# Altium PCB Bat_Detector_PCB.PcbDoc
Units mm, origin at the board's own origin, x right, y up, seen from the top; angles counter-clockwise.
Board outline 22.86 x 24.77 mm, 2 copper layers (Top Layer, Bottom Layer); 13 components, 7 nets, 34 pads, 54 vias.
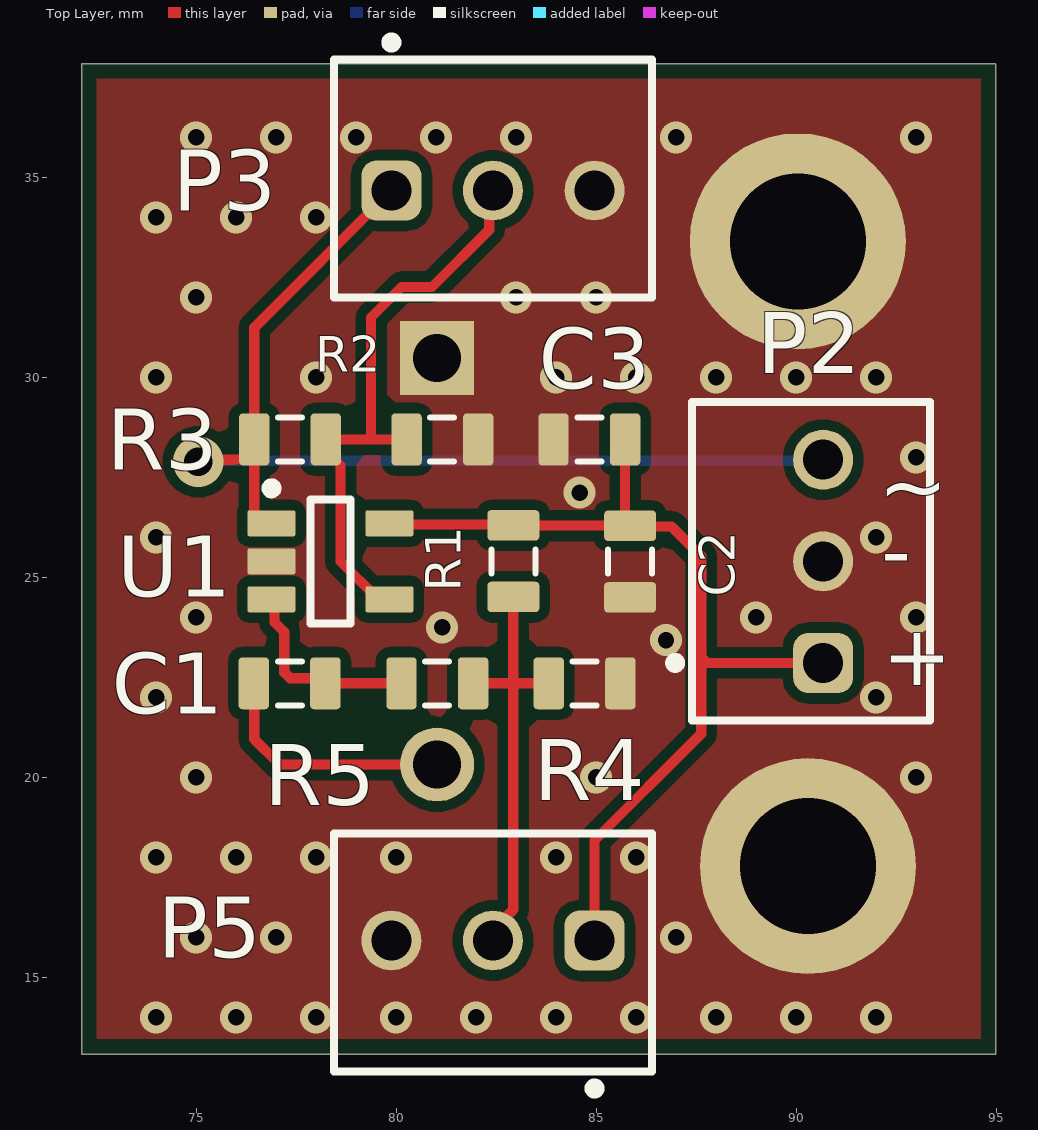
[diagram p0: Top Layer view]
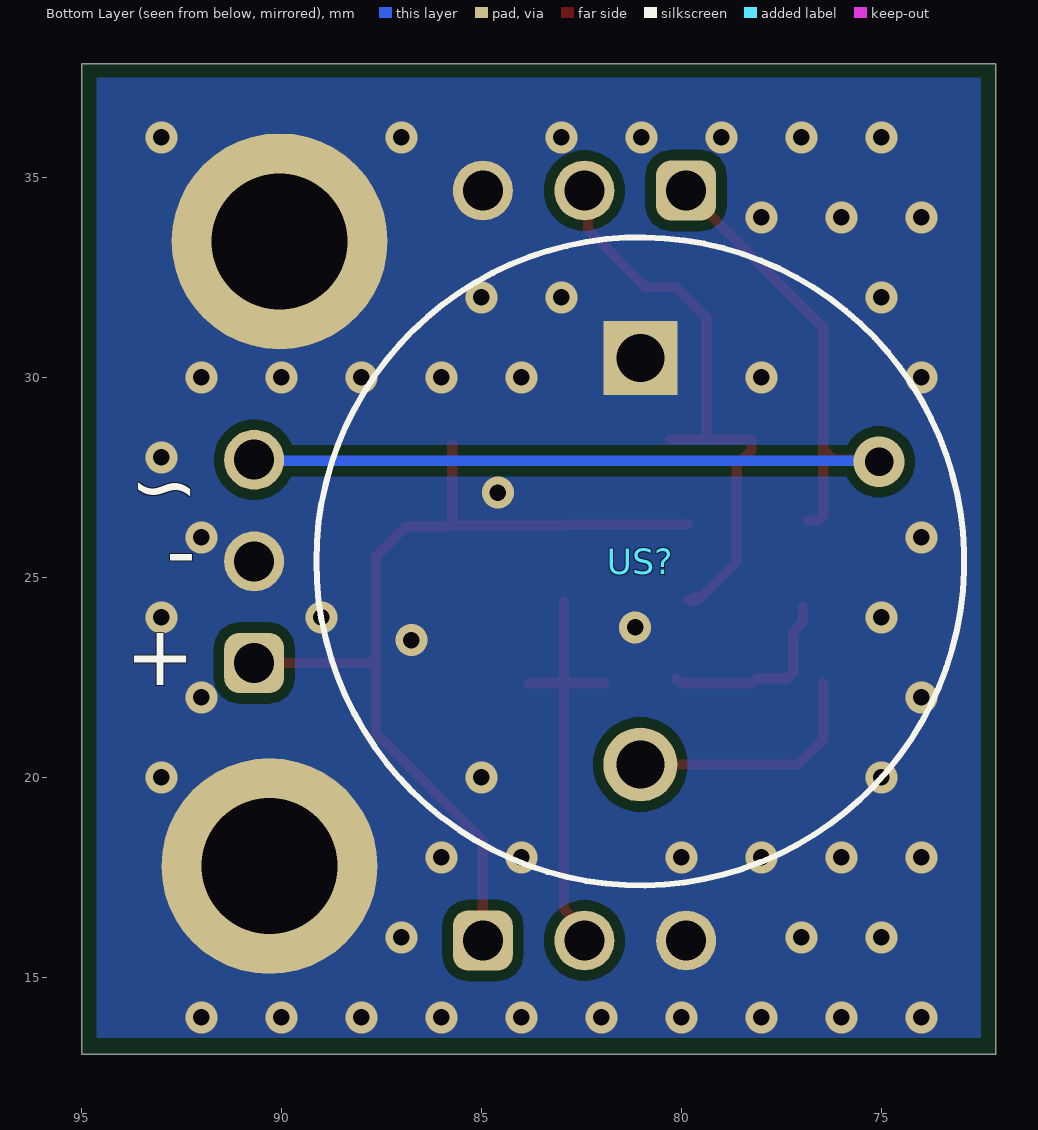
[diagram p1: Bottom Layer view, seen from below]
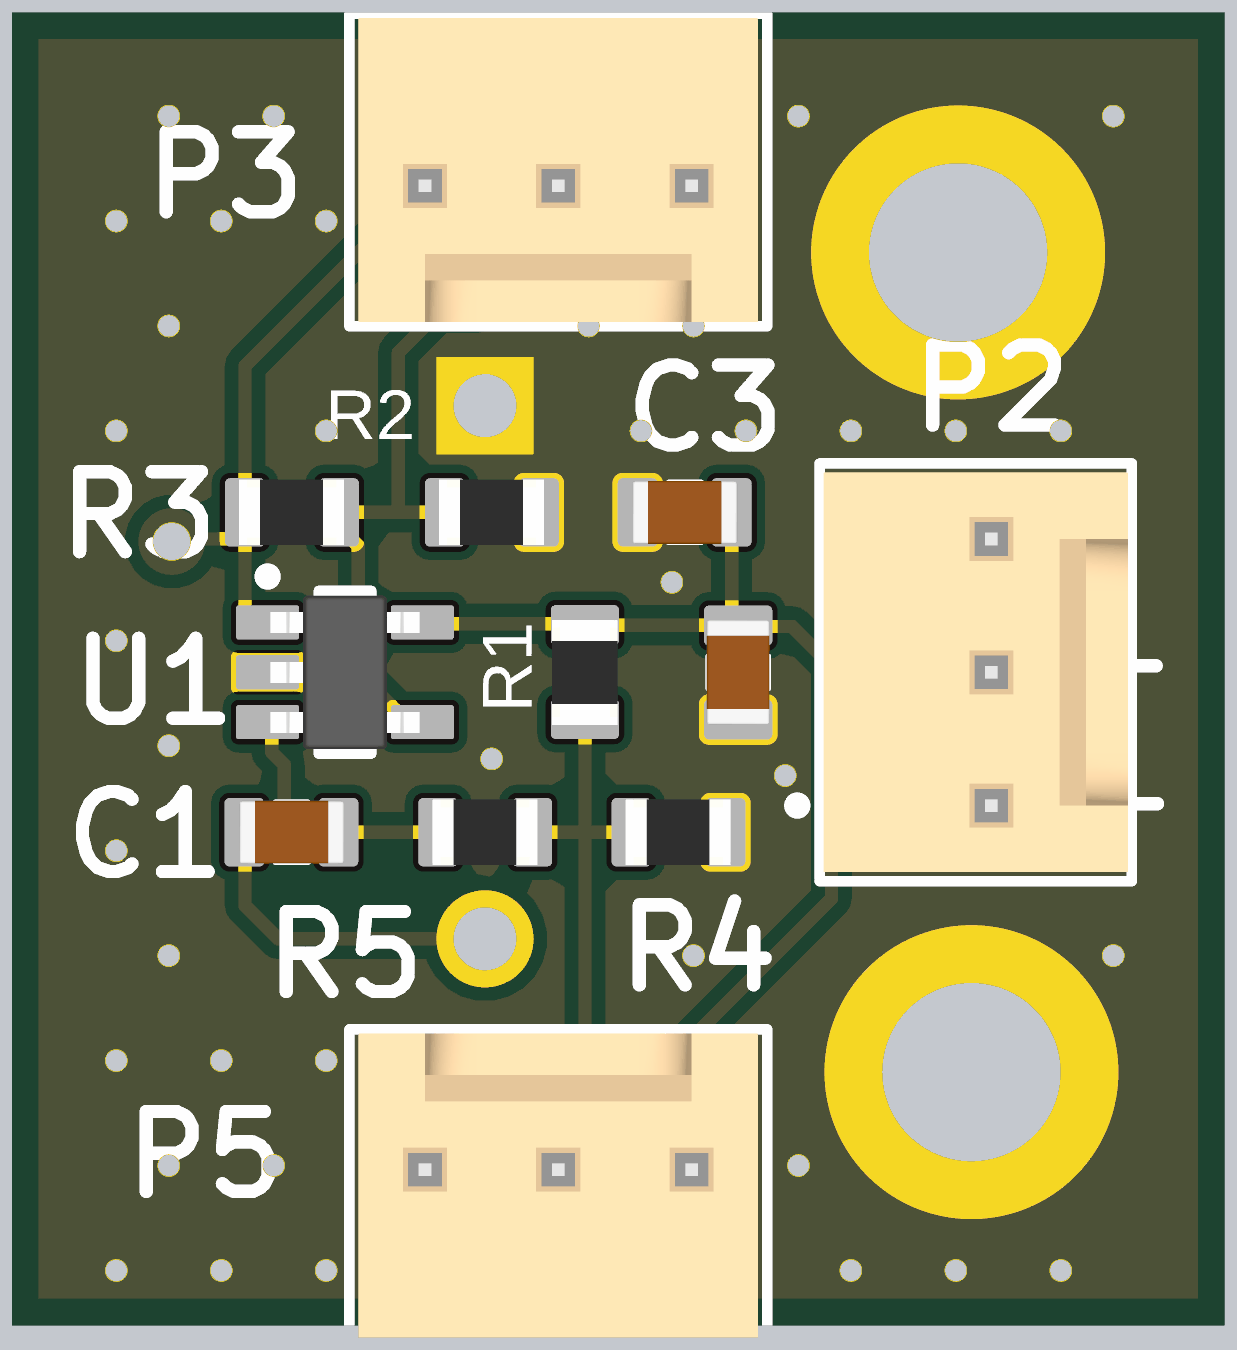
[diagram p2: 3D render of the assembled board from above, using the file's embedded part models]

## Layer stack, top to bottom
Top Solder: solder mask 0.0102, Solder Resist, Dk 3.5
Top Layer: signal copper 0.0356
Dielectric 1: dielectric 0.32, FR-4, Dk 4.8
Bottom Layer: signal copper 0.0356
Bottom Solder: solder mask 0.0102, Solder Resist, Dk 3.5

## Board outline
72.136,13.081 72.136,37.846 94.996,37.846 94.996,13.081

## Design rules (kind name [scope] priority, off if disabled: settings)
Clearance "Stitching GND" [IsStitchingVia and InNet('GND') vs (IsVia and (Not IsStitchingVia)) Or IsPad] p1: gap=0.127 ignorepadtopadclearanceinfootprint=FALSE
Clearance [All] p2: gap=0.254 ignorepadtopadclearanceinfootprint=FALSE
PolygonConnect [All] p1: connectstyle=Direct reliefconductorwidth=0.254 reliefentries=4 polygonreliefangle="90 Angle" airgapwidth=0.254
RoutingVias [All] p1: holewidth=0.711 width=1.27 viastyle="Through Hole" minholewidth=0.711 minwidth=1.27 maxholewidth=0.711 maxwidth=1.27
SolderMaskExpansion [All] p1: expansion=0.102 istentingtop=FALSE
SupplyNets "Schematic Supply Nets_1" [InNet('+3.3V')] p1: voltage=0.000
SupplyNets "Schematic Supply Nets" [InNet('GND')] p2: voltage=0.000
Width [All] p1: maxlimit=0.254 minlimit=0.254 preferedwidth=0.254
30 further rules are at their usual default settings.

## Components (designator, comment, footprint, x,y, rotation, side; value= is the part's Value field where it differs from the comment)
C1 "Capacitor 4.7µF +/-40% 25V 0805" CAPC0805(2012)145_L 77.343,22.352 r0 top value=15nF
C2 "Capacitor 4.7µF +/-40% 25V 0805" CAPC0805(2012)145_L 85.852,25.4 r90 top value=1µF
C3 "Capacitor 4.7µF +/-40% 25V 0805" CAPC0805(2012)145_L 84.836,28.448 r0 top value=15nF
P2 "61900311121" 61900311121 90.378,25.4 r270 top
P3 "61900311121" 61900311121 82.423,34.971 r180 top
P5 "61900311121" 61900311121 82.423,15.621 r0 top
R1 "Resistor 1K +/-5% 0805 125 mW" RESC0805(2012)_L 82.931,25.4 r270 top value=80k
R2 "Resistor 1K +/-5% 0805 125 mW" RESC0805(2012)_L 81.153,28.448 r180 top value=10k
R3 "Resistor 1K +/-5% 0805 125 mW" RESC0805(2012)_L 77.343,28.448 r180 top value=90k
R4 "Resistor 1K +/-5% 0805 125 mW" RESC0805(2012)_L 84.709,22.352 r180 top value=5k
R5 "Resistor 1K +/-5% 0805 125 mW" RESC0805(2012)_L 81.026,22.352 r180 top value=10k
U1 "OPA356AIDBVR" DBV0005A_M 78.359,25.4 r0 top
US? "UltrasonicSensor" RESMELF110150N 81.026,25.4 r270 bottom

## Footprints (in the part's own frame and the unit in brackets; to place one, negate y for a bottom-side part, rotate by r counter-clockwise, add the part's x,y. Pads: shape width x height; smd on the part's side, far side on the other; paste and mask are expansions set on the pad)
61900311121 [mm] "2.54mm Male Locking Header, 3p"
  rrect50% 1.5x1.5 hole 1: 1(2.54,0.3)
  round 1.5 hole 1: 2(0,0.3) 3(-2.54,0.3)
  silkscreen extent -3.98,-3.52 3.98,2.98, body extent -3.81,-2.9 3.81,2.9, height 11.53
CAPC0805(2012)145_L [mm] "Chip Capacitor, Body 2.0x1.2mm, Height 1.45mm, IPC High Density"
  rrect25% 0.76x1.3 smd: 1(-0.9,0) 2(0.89,0)
  silkscreen extent -0.3,-0.55 0.3,0.55, body extent -1,-0.6 1,0.6, height 1.45
DBV0005A_M [mm] "SOT23, 5-Leads, Body 3.05x1.75mm, Pitch 0.95mm, IPC Low Density"
  rrect15% 1.2x0.65 smd: 1(-1.475,0.95) 2(-1.475,0) 3(-1.475,-0.95) 4(1.475,-0.95) 5(1.475,0.95)
  silkscreen extent -1.6,-1.55 0.5,1.95, body extent -1.42,-1.46 1.42,1.46, height 1.08
RESC0805(2012)_L [mm] "Chip Resistor, Body 2.0x1.3mm, IPC High Density"
  rrect25% 0.76x1.3 smd: 1(-0.9,0) 2(0.89,0)
  silkscreen extent -0.3,-0.55 0.3,0.55, body extent -1,-0.62 1,0.63, height 0.6
RESMELF110150N [mm] "MELF Resistor, 2-Leads, Body 11,00x15,00mm, IPC Medium Density"
  round 1.85 hole 1.2 paste-2539.97 mask+0: 0(5.08,0)
  rect 1.85x1.85 hole 1.2 paste-2539.97 mask+0: 1(-5.08,0)
  silkscreen extent -8.1,-8.1 8.1,8.1, body extent -8.13,-8.13 8.13,8.13, height 5.08

## Part data
C1 C2 C3: library part CMP-001-00080-4, "Chip Capacitor, 4.7µF +/-40%, 25V, 0805, Thickness 1.45 mm", Case/Package=0805, Max Operating Temperature=85°C, Min Operating Temperature=-55°C, Tolerance=20%, Voltage Rating=25V, Mounting Technology=SMT, Pins=2
P2 P3 P5: library part CMP-1502-00585-2, Color=Beige, Contact Resistance=20mΩ, Current Rating=3A, Flammability Rating="UL94 V-0", Insulation Resistance=1GΩ, Max Operating Temperature=105°C, Min Operating Temperature=-40°C, Operating Supply Voltage=250V, Connector Type="Male Pin", Contact Gender=Male, Contact Material=Copper, Contact Mating Length=7.493mm, Contact Plating=Tin, Fastening Type=Friction, Gender=Male, Height=12.5mm, Housing Material=Nylon, Lead Pitch=2.54mm, Length=7.62mm, Mount="Through Hole", NexarPartId=18818222, Number of Contacts=3, Number of Pins=3, Number of Positions=3, Number of Rows=1, Orientation=Vertical, Packaging=Bulk, Pitch=2.54mm, REACH SVHC=Unknown, RoHS=Compliant, Termination="Through Hole", Voltage Rating=250V, Width=7.66mm
R1 R2 R3 R4 R5: library part CMP-009-00118-3, "Chip Resistor, 1 kOhms, +/-5%, 125 mW, -55 to 155 degC, 0805", Case/Package=0805, Max Operating Temperature=155°C, Min Operating Temperature=-55°C, Power=125mW, Tolerance=5%, Pins=2
U1: library part CMP-0016-00070-2, "200 MHz GBW, CMOS Single Operational Amplifier, 2.5 to 5.5 V, -40 to 125 degC, 5-pin SOT23 (DBV5), Green (RoHS & no Sb/Br)", Manufacturer="Texas Instruments", 2nd Harmonic(dBc)=81, 3rd Harmonic(dBc)=93, @ MHz=1, Acl, min stable gain(V/V)=1, BW @ Acl(MHz)=450, Code_JEDEC=MO-178, ComponentLink1Description="Manufacturer URL", ComponentLink1URL=http://www.ti.com/, ComponentLink2Description=Datasheet, ComponentLink2URL=http://www.ti.com/general/docs/lit/getliterature.tsp?genericPartNumber=OPA356&fileType=pdf, ComponentLink3Description="Package Specification", ComponentLink3URL=http://www.ti.com/litv/pdf/mpds018i, DatasheetVersion=SBOS212A, Diff Gain(%)=0.02, Diff Phase(deg)=0.05, Eco-Plan="Green (RoHS & no Sb/Br)", Iib(Max)(nA)=0.05, Io(Typ)(mA)=100, Iq per channel(Max)(mA)=14, Mounting Technology="Surface Mount", Number of Channels=1, PackageDescription="5-Pin Plastic Small Outline, Body 1.6 x 2.9 mm, Pitch 0.95 mm", PackageReference=DBV0005A, PackageVersion="4073253-4/K, 03/2006", PartNumber=OPA356AIDBVR, Rail-Rail=Out, Settling Time (0.1%)(Typ)(ns)=30, Slew Rate(Typ)(V/us)=360, Sub Family="High Output Current Amplifier (>=50mA), High Speed Amplifier (>=50MHz), Low Supply Voltage Amplifier (<=2.7V)", THD (Fc is 1 MHz)(Typ)(dB)=-79, Vio(Max)(mV)=9, Vn at Flatband(Typ)(nV/rtHz)=5.8, Vs(Max)(V)=5.5, Vs(Min)(V)=2.5
US?: "A simple ultrasonic sensor HC-SR04"

## Free pads (board coordinates)
  round 5.4 hole 3.4: 2(90.043,33.401) 3(90.297,17.78)

## Via types
v1: diameter 0.8, hole 0.411, Top Layer to Bottom Layer, tented both sides, 53 vias
v2: diameter 1.27, hole 0.711, Top Layer to Bottom Layer, tented both sides, 1 vias

## Nets (pads, with @x,y where several pads share a name; then routed paths per layer and width w, separated by ;. In a path a pad name is that pad's centre, name@x,y a point inside that pad or via, vN(x,y) a via of type N, cw(c..) or ccw(c..) an arc to the next point about the centre after c; other vN are vias at no path point)
+3.3V: C2.2 C3.2 P2.1 P5.1 R1.1 U1.5 | length 23.8
  Top Layer w0.254: U1.5 79.859,26.325 R1.1@82.895,26.325 ; R1.1 82.936,26.295 C2.2@85.846,26.295 ; P5.1 84.963,18.423 87.63,21.09 87.63,22.987 ; C3.2@85.725,28.321 85.726,28.32 85.726,26.416 C2.2 85.868,26.274 86.883,26.274 87.63,25.527 87.63,23.009 ; 87.641,22.998 87.779,22.86 P2.1@90.551,22.86
GND: C2.1 C3.1 P2.2 P3.3 P5.3 pad.2 pad.3 R2.1 R4.1 U1.2 US?.1 | length 0.4
  Top Layer w0.254: US?.1 US?.1@81.294,30.212
  other v1: 74,14 76,14 78,14 80,14 82,14 84,14 86,14 88,14 90,14 92,14 75,16 77,16 87,16 74,18 76,18 78,18 80,18 84,18 86,18 75,20 85,20 93,20 74,22 92,22 86.748,23.432 81.153,23.749 75,24 89,24 93,24 74,26 92,26 84.589,27.115 93,28 74,30 78,30 84,30 86,30 88,30 90,30 92,30 75,32 83,32 85,32 74,34 76,34 78,34 75,36 77,36 79,36 81,36 83,36 87,36 93,36
NetC1_1: C1.1 US?.0 | length 6.2
  Top Layer w0.254: C1.1@76.454,22.352 76.454,20.955 77.089,20.32 US?.0
NetC1_2: C1.2 R5.2 U1.3 | length 4.8
  Top Layer w0.254: U1.3@76.962,24.257 76.962,23.876 77.204,23.634 77.204,22.628 77.353,22.479 78.106,22.479 C1.2 80.01,22.352 R5.2@80.137,22.479
NetP2_3: P2.3 P3.1 R3.2 U1.1 | length 27.5
  Top Layer w0.254: v2@75.057,27.94 75.945,27.94 75.95,27.945 76.2,27.945 76.453,28.198 R3.2 76.453,26.548 76.585,26.416 U1.1@76.835,26.416 ; R3.2 76.454,31.242 P3.1
  Bottom Layer w0.254: v2(75.057,27.892) 75.081,27.916 90.575,27.916 P2.3@90.678,27.813
  Bottom Layer w0.508: P2.3@90.63,27.892 P2.3
NetP3_2: P3.2 R2.2 R3.1 U1.4 | length 14.9
  Top Layer w0.254: R3.1 78.243,28.178 78.613,27.808 78.613,25.396 79.559,24.45 U1.4@79.69,24.45 ; R3.1@78.359,28.448 79.375,28.448 ; U1.4@79.615,24.525 U1.4@79.69,24.45 ; U1.4@79.756,24.384 U1.4@79.69,24.45 ; U1.4 U1.4@79.69,24.45 ; R2.2 79.651,28.448 79.375,28.448 ; P3.2 82.33,34.578 82.33,33.689 80.899,32.258 80.137,32.258 79.375,31.496 79.375,28.448
NetP5_2: P5.2 R1.2 R4.2 R5.1 | length 10.6
  Top Layer w0.254: R5.1 82.931,22.352 ; P5.2 82.423,16.185 82.931,16.693 82.931,22.352 ; R1.2@82.931,24.384 82.931,22.352 ; R4.2 82.931,22.352

## Polygon pours and split planes (outlines as drawn)
GND on Top Layer "GND_L01_P000" (solid, remove dead copper, pour order 0): 72.517,13.462 72.517,37.465 94.615,37.465 94.615,13.462
GND on Bottom Layer "GND_L02_P001" (solid, remove dead copper, pour order 1): 72.517,13.485 72.517,37.488 94.615,37.488 94.615,13.485

## Silkscreen, mask and mechanical layers (free items; w line width, h text height)
Top Overlay:
  text "~" at 92.05,26.543 h1.52
  text "-" at 92.126,24.93 h1.52
  text "+" at 92.151,22.301 h1.52
Bottom Overlay:
  text "~" at 92.05,26.543 h1.52
  text "-" at 92.126,24.93 h1.52
  text "+" at 92.151,22.301 h1.52
Board Outline:
  the board outline again, w0.254
Top Component Center:
  lines w0.254: 72.263,25.4 95.123,25.4